# EAGLE board led_cube_schematic (EAGLE 7.7.0)
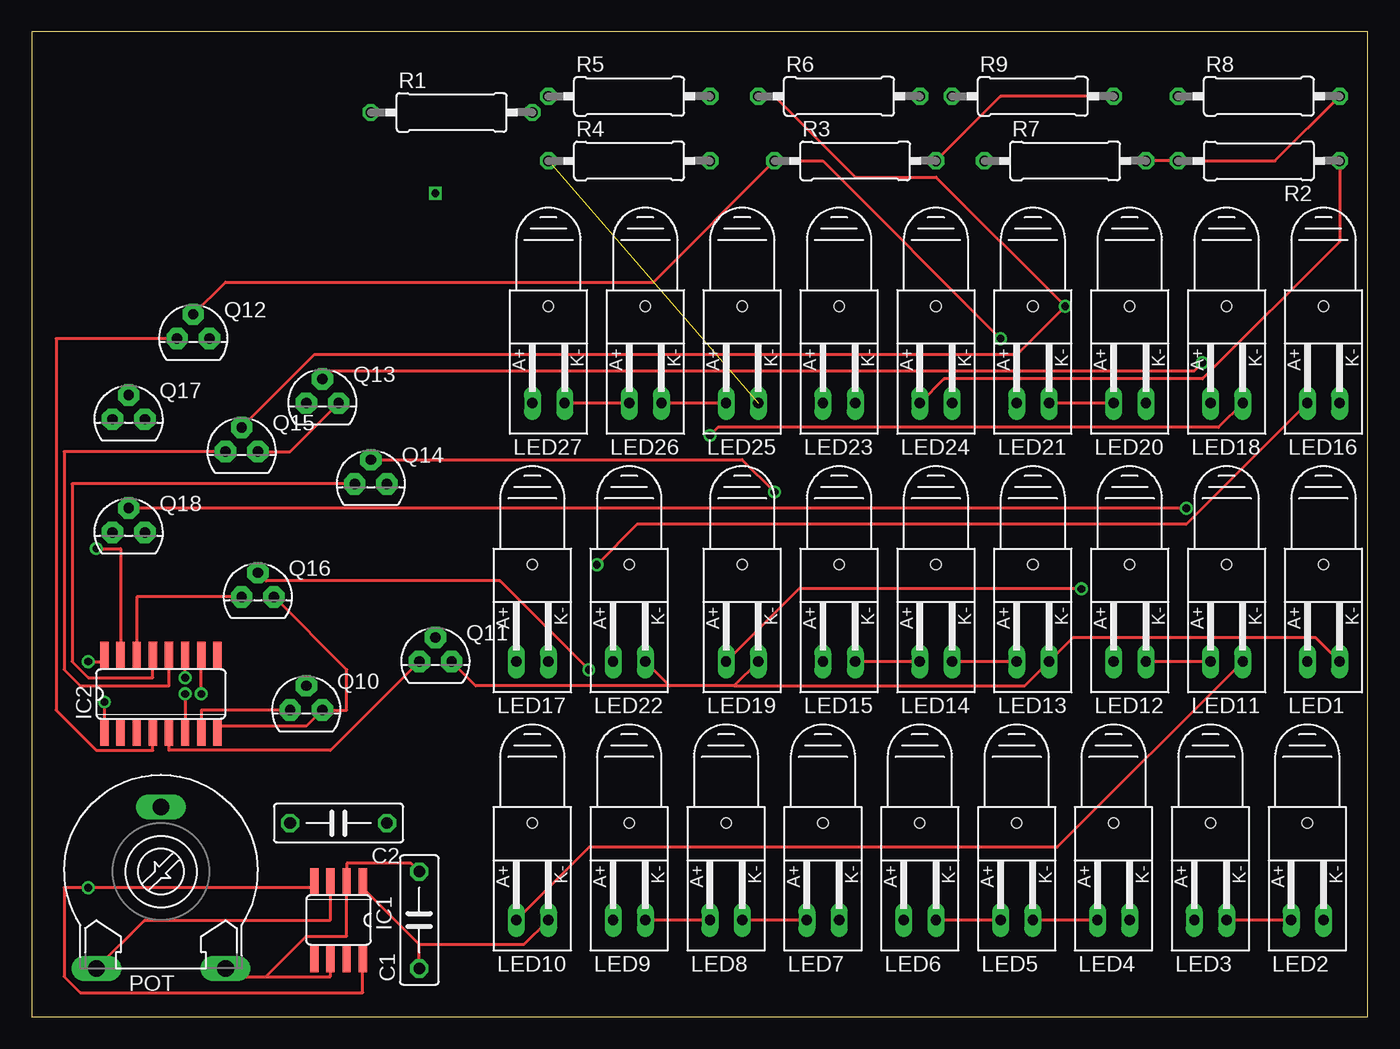
[diagram p0: board, top side]
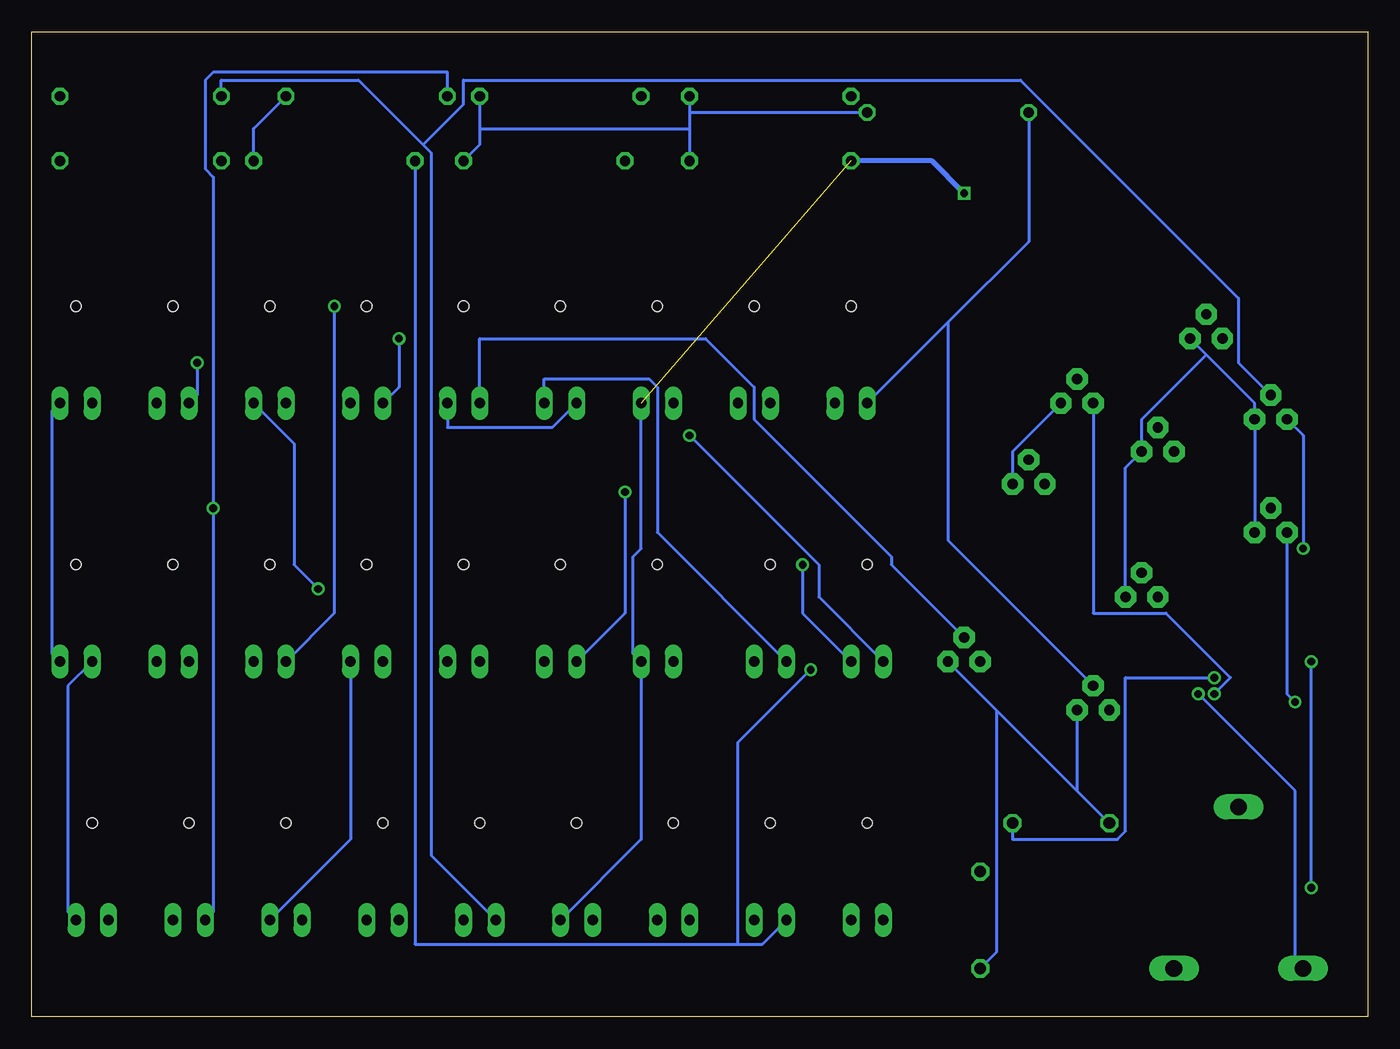
[diagram p1: board, bottom side, seen from below]

Size 105.08 x 77.46 mm. Coordinates in mm from the lower left corner, seen from the top.
Outline: 0,0 105.08,0 105.08,77.46 0,77.46 0,0
Copper layers (1*16): Top 0.035mm / dielectric 1.5mm / Bottom 0.035mm
Design rules "default": minimum track width 10mil, minimum drill 24mil, track to track 8mil, track to pad 8mil, pad to pad 8mil, via to via 8mil, smd to smd 8mil, copper to edge 40mil, drill to drill 8mil, minimum pad ring 10mil, minimum via ring 8mil, stop-mask expansion 4mil, vias tented up to drill 0mil, thermal gap 10mil

## Footprints (pad centres in the part's own frame; a part is rotated, then mirrored left to right if it is on the bottom)
C075-032X103 = drill 0.914 octagon: 1 -3.81,0; 2 3.81,0
SO08 = smd 0.66 x 2.032: 1 -1.905,-3.073; 2 -0.635,-3.073; 3 0.635,-3.073; 4 1.905,-3.073; 5 1.905,3.073; 6 0.635,3.073; 7 -0.635,3.073; 8 -1.905,3.073
SO16 = smd 0.66 x 2.032: 1 -4.445,-3.073; 2 -3.175,-3.073; 3 -1.905,-3.073; 4 -0.635,-3.073; 5 0.635,-3.073; 6 1.905,-3.073; 7 3.175,-3.073; 8 4.445,-3.073; 9 4.445,3.073; 10 3.175,3.073; 11 1.905,3.073; 12 0.635,3.073; 13 -0.635,3.073; 14 -1.905,3.073; 15 -3.175,3.073; 16 -4.445,3.073
Q62902-B155 = drill 0.813 long: A 7.62,-1.27; K 7.62,1.27 | hole 0.813: 0,0
LI15 = drill 1.321 long: A -5.08,-7.62; E 5.08,-7.62; S 0,5.08
TO92 = drill 0.813 pad 1.676 octagon: 1 -1.27,0; 2 0,1.905; 3 1.27,0
0309/12 = drill 0.813 octagon: 1 -6.35,0; 2 6.35,0

## Placement (x,y rotation side)
C1  22uF  [C075-032X103]  30.48,7.62 90 top
C2  100nF  [C075-032X103]  24.13,15.24 180 top
IC1  LM555D  [SO08]  24.13,7.62 180 top
IC2  4020D  [SO16]  10.16,25.4 0 top
LED1  [Q62902-B155]  101.6,35.56 270 top
LED2  [Q62902-B155]  100.33,15.24 270 top
LED3  [Q62902-B155]  92.71,15.24 270 top
LED4  [Q62902-B155]  85.09,15.24 270 top
LED5  [Q62902-B155]  77.47,15.24 270 top
LED6  [Q62902-B155]  69.85,15.24 270 top
LED7  [Q62902-B155]  62.23,15.24 270 top
LED8  [Q62902-B155]  54.61,15.24 270 top
LED9  [Q62902-B155]  46.99,15.24 270 top
LED10  [Q62902-B155]  39.37,15.24 270 top
LED11  [Q62902-B155]  93.98,35.56 270 top
LED12  [Q62902-B155]  86.36,35.56 270 top
LED13  [Q62902-B155]  78.74,35.56 270 top
LED14  [Q62902-B155]  71.12,35.56 270 top
LED15  [Q62902-B155]  63.5,35.56 270 top
LED16  [Q62902-B155]  101.6,55.88 270 top
LED17  [Q62902-B155]  39.37,35.56 270 top
LED18  [Q62902-B155]  93.98,55.88 270 top
LED19  [Q62902-B155]  55.88,35.56 270 top
LED20  [Q62902-B155]  86.36,55.88 270 top
LED21  [Q62902-B155]  78.74,55.88 270 top
LED22  [Q62902-B155]  46.99,35.56 270 top
LED23  [Q62902-B155]  63.5,55.88 270 top
LED24  [Q62902-B155]  71.12,55.88 270 top
LED25  [Q62902-B155]  55.88,55.88 270 top
LED26  [Q62902-B155]  48.26,55.88 270 top
LED27  [Q62902-B155]  40.64,55.88 270 top
POT  10K  [LI15]  10.16,11.43 0 top
Q10  FQN1N50C  [TO92]  21.59,24.13 0 top
Q11  FQN1N50C  [TO92]  31.75,27.94 0 top
Q12  FQN1N50C  [TO92]  12.7,53.34 0 top
Q13  FQN1N50C  [TO92]  22.86,48.26 0 top
Q14  FQN1N50C  [TO92]  26.67,41.91 0 top
Q15  FQN1N50C  [TO92]  16.51,44.45 0 top
Q16  FQN1N50C  [TO92]  17.78,33.02 0 top
Q17  FQN1N50C  [TO92]  7.62,46.99 0 top
Q18  FQN1N50C  [TO92]  7.62,38.1 0 top
R1  600 Ohm  [0309/12]  33.02,71.12 0 top
R2  600 Ohm  [0309/12]  96.52,67.31 180 top
R3  600 Ohm  [0309/12]  64.77,67.31 0 top
R4  600 Ohm  [0309/12]  46.99,67.31 0 top
R5  600 ohm  [0309/12]  46.99,72.39 0 top
R6  600 Ohm  [0309/12]  63.5,72.39 0 top
R7  600 Ohm  [0309/12]  81.28,67.31 0 top
R8  600 Ohm  [0309/12]  96.52,72.39 0 top
R9  600 Ohm  [0309/12]  78.74,72.39 0 top

## Library data of the parts
C1 C2 IC1 LED1-LED27 Q10-Q18 = adafruit
IC2 = 40xx
POT = pot
R1-R9 = resistor

## Nets
GND: C1.1 C2.2 IC1.1 IC2.8 LED1.K LED4.K LED7.K LED10.K LED13.K LED16.K LED19.K LED22.K LED25.K Q10.3 Q11.3 Q12.3 Q13.3 Q14.3 Q15.3 Q16.3 Q17.3 Q18.3
N$1: C1.2 IC1.2 IC1.6 POT.E
N$2: IC2.1 Q18.1
N$3: IC1.3 IC2.10 POT.A
N$4: IC2.15 Q17.1
N$5: C2.1 IC2.11
N$6: IC2.14 Q16.1
N$7: IC2.12 Q15.1
N$8: IC2.13 Q14.1
N$9: IC2.6 Q13.1
N$10: IC2.4 Q12.1
N$11: IC2.5 Q11.1
N$12: IC2.7 Q10.1
N$13: LED1.A LED2.K
N$14: LED2.A LED3.K
N$15: LED4.A LED5.K
N$16: LED5.A LED6.K
N$17: LED7.A LED8.K
N$18: LED8.A LED9.K
N$19: LED10.A LED11.K
N$20: LED11.A LED12.K
N$21: LED13.A LED14.K
N$22: LED14.A LED15.K
N$23: LED16.A LED17.K
N$24: LED17.A LED18.K
N$25: LED19.A LED20.K
N$26: LED20.A LED21.K
N$27: LED22.A LED23.K
N$28: LED23.A LED24.K
N$29: LED25.A LED26.K
N$30: LED26.A LED27.K
N$31: LED3.A Q18.2 R9.1
N$32: LED6.A Q17.2 R8.1
N$33: LED9.A Q16.2 R7.1
N$34: LED12.A Q15.2 R6.1
N$35: LED15.A Q14.2
N$36: LED18.A Q13.2
N$37: LED21.A Q12.2 R3.1
N$38: LED24.A Q11.2 R2.1
N$39: LED27.A Q10.2 R1.1
N$40: R1.2 R2.2 R3.2 R4.2 R5.2 R6.2 R7.2 R8.2 R9.2
VCC: IC1.4 IC1.8 IC2.16

## Tracks (layer width: path | path; a pad name or v marks a point on that pad's centre or on a via)
GND  (via drill 0.6)  (1 unrouted)
  Top 0.254: Q13.3 20.32,44.45 Q15.3 | 30.48,5.71 26.03,10.16 IC1.1 | C1.1 30.48,5.71 | LED10.K 38.73,5.71 30.48,5.71 | IC2.8 14.61,22.86 21.59,22.86 Q10.3 24.77,24.13 24.77,27.3 Q16.3 | 50.16,26.04 LED22.K | 55.24,26.04 50.16,26.04 | LED19.K 55.24,26.04 | 55.24,26.04 78.11,26.04 LED13.K 81.91,29.84 100.97,29.84 LED1.K | Q11.3 34.92,26.04 50.16,26.04
  Bottom 0.254: Q18.3 Q17.3 8.89,48.26 12.7,52.07 | 12.7,52.07 Q12.3 | Q16.3 19.05,43.18 Q15.3 17.78,46.99 12.7,52.07 | Q14.3 27.94,44.45 Q13.3 | 22.86,17.78 C2.2 | Q10.3 22.86,17.78 | 22.86,17.78 29.21,24.13 | 29.21,24.13 Q11.3 | C1.1 29.21,5.08 29.21,24.13 | LED1.K 103.5,28.57 103.5,47.62 LED16.K | LED25.K 57.15,36.83 57.78,36.2 57.78,28.57 LED19.K 57.15,13.97 LED7.K | LED4.K 80.01,13.97 LED13.K
  Bottom 0.406: v31.75,64.77 34.29,67.31 40.64,67.31
N$1
  Top 0.254: C1.2 29.84,12.07 24.77,12.07 IC1.2 24.77,6.35 21.59,6.35 18.41,3.17 | IC1.6 23.49,3.17 18.41,3.17 | 18.41,3.17 15.88,3.17 POT.E
N$2  (via drill 0.61)
  Top 0.254: v5.71,24.77 IC2.1
  Bottom 0.254: v5.71,24.77 6.35,25.4 Q18.1
N$3  (via drill 0.61)
  Top 0.254: IC1.3 23.49,7.62 8.89,7.62 POT.A | v13.34,25.4 IC2.10
  Bottom 0.254: v13.34,25.4 5.71,17.78 5.71,4.45 POT.A
N$4  (via drill 0.61)
  Top 0.254: IC2.15 6.99,36.83 v5.08,36.83
  Bottom 0.254: v5.08,36.83 5.08,45.72 Q17.1
N$5  (via drill 0.61)
  Top 0.254: v12.07,26.67 IC2.11
  Bottom 0.254: v12.07,26.67 19.05,26.67 19.05,14.61 19.69,13.97 27.94,13.97 C2.1
N$6
  Top 0.254: IC2.14 8.25,33.02 Q16.1
N$7
  Top 0.254: IC2.12 10.79,26.04 3.81,26.04 2.54,27.3 2.54,44.45 Q15.1
N$8
  Top 0.254: IC2.13 9.53,26.67 4.45,26.67 3.17,27.94 3.17,41.91 Q14.1
N$9  (via drill 0.61)
  Top 0.254: v12.07,25.4 IC2.6
  Bottom 0.254: v12.07,25.4 10.79,26.67 15.88,31.75 21.59,31.75 Q13.1
N$10
  Top 0.254: IC2.4 9.53,20.95 5.08,20.95 1.91,24.13 1.91,53.34 Q12.1
N$11
  Top 0.254: IC2.5 10.79,20.95 23.49,20.95 Q11.1
N$12
  Top 0.254: IC2.7 13.34,24.13 Q10.1
N$13
  Bottom 0.254: LED2.K 102.23,8.25 102.23,26.04 LED1.A
N$14
  Top 0.254: LED2.A LED3.K
N$15
  Top 0.254: LED4.A LED5.K
N$16
  Top 0.254: LED5.A LED6.K
N$17
  Top 0.254: LED7.A LED8.K
N$18
  Top 0.254: LED8.A LED9.K
N$19
  Top 0.254: LED10.A 43.81,13.34 80.64,13.34 LED11.K
N$20
  Top 0.254: LED11.A LED12.K
N$21
  Top 0.254: LED13.A LED14.K
N$22
  Top 0.254: LED14.A LED15.K
N$23  (via drill 0.61)
  Top 0.254: v44.45,35.56 47.62,38.73 90.8,38.73 LED16.A
  Bottom 0.254: LED17.K 44.45,31.75 v44.45,35.56
N$24  (via drill 0.61)
  Top 0.254: v53.34,45.72 53.98,46.35 93.34,46.35 LED18.K
  Bottom 0.254: LED17.A 43.18,33.02 43.18,35.56 v53.34,45.72
N$25  (via drill 0.61)
  Top 0.254: LED19.A 60.32,33.66 v82.55,33.66
  Bottom 0.254: v82.55,33.66 84.45,35.56 84.45,45.09 LED20.K
N$26
  Top 0.254: LED20.A LED21.K
N$27
  Bottom 0.254: LED22.A 55.88,38.1 55.88,49.53 56.52,50.16 64.77,50.16 LED23.K
N$28
  Bottom 0.254: LED23.A 64.14,46.35 72.39,46.35 LED24.K
N$29
  Top 0.254: LED25.A LED26.K
N$30
  Top 0.254: LED26.A LED27.K
N$31  (via drill 0.61)
  Top 0.254: v90.8,40.01 Q18.2
  Bottom 0.254: LED3.A 90.8,8.25 v90.8,40.01 90.8,66.04 91.44,66.68 91.44,73.66 90.8,74.3 72.39,74.3 R9.1
N$32
  Bottom 0.254: LED6.A 73.66,12.7 73.66,67.95 74.3,68.58 | 74.3,68.58 79.38,73.66 90.17,73.66 R8.1 | Q17.2 10.16,51.44 10.16,56.52 27.3,73.66 71.12,73.66 71.12,71.76 74.3,68.58
N$33  (via drill 0.61)
  Top 0.254: Q16.2 18.41,34.29 36.83,34.29 v43.81,27.3
  Bottom 0.254: LED9.A 47.62,5.71 49.53,5.71 | 49.53,5.71 74.93,5.71 R7.1 | v43.81,27.3 49.53,21.59 49.53,5.71
N$34  (via drill 0.61)
  Top 0.254: R6.1 58.42,72.39 64.77,66.04 71.12,66.04 v81.28,55.88 77.47,52.07 22.23,52.07 Q15.2
  Bottom 0.254: LED12.A 81.28,31.75 v81.28,55.88
N$35  (via drill 0.61)
  Top 0.254: v58.42,41.27 55.88,43.81 Q14.2
  Bottom 0.254: LED15.A 58.42,31.75 v58.42,41.27
N$36  (via drill 0.61)
  Top 0.254: v92.08,51.44 91.44,50.8 23.49,50.8 Q13.2
  Bottom 0.254: LED18.A 92.08,48.89 v92.08,51.44
N$37  (via drill 0.61)
  Top 0.254: Q12.2 15.24,57.78 48.89,57.78 R3.1 62.23,67.31 v76.2,53.34
  Bottom 0.254: LED21.A 76.2,49.53 v76.2,53.34
N$38
  Top 0.254: LED24.A 71.75,50.16 92.08,50.16 102.87,60.96 R2.1
  Bottom 0.254: Q11.2 37.46,35.56 37.46,36.2 48.26,46.99 48.26,49.53 52.07,53.34 69.85,53.34 LED24.A
N$39
  Bottom 0.254: 33.02,54.61 26.67,60.96 R1.1 | 33.02,54.61 LED27.A | Q10.2 33.02,37.46 33.02,54.61
N$40
  Top 0.254: R7.2 R2.2 97.79,67.31 R8.2 | R3.2 76.2,72.39 R9.2
  Bottom 0.254: R5.2 53.34,71.12 | 53.34,71.12 53.34,69.85 | 53.34,69.85 R4.2 | 53.34,71.12 R1.2 | R3.2 69.85,68.58 69.85,69.85 | R6.2 69.85,69.85 | R9.2 87.63,69.85 R7.2 | 69.85,69.85 53.34,69.85
VCC  (via drill 0.61)
  Top 0.254: IC1.8 26.03,1.91 3.81,1.91 2.54,3.17 2.54,10.16 v4.45,10.16 22.23,10.16 IC1.4 | v4.45,27.94 5.71,27.94 IC2.16
  Bottom 0.254: v4.45,10.16 v4.45,27.94